# EAGLE board Spinning (EAGLE 6.2)
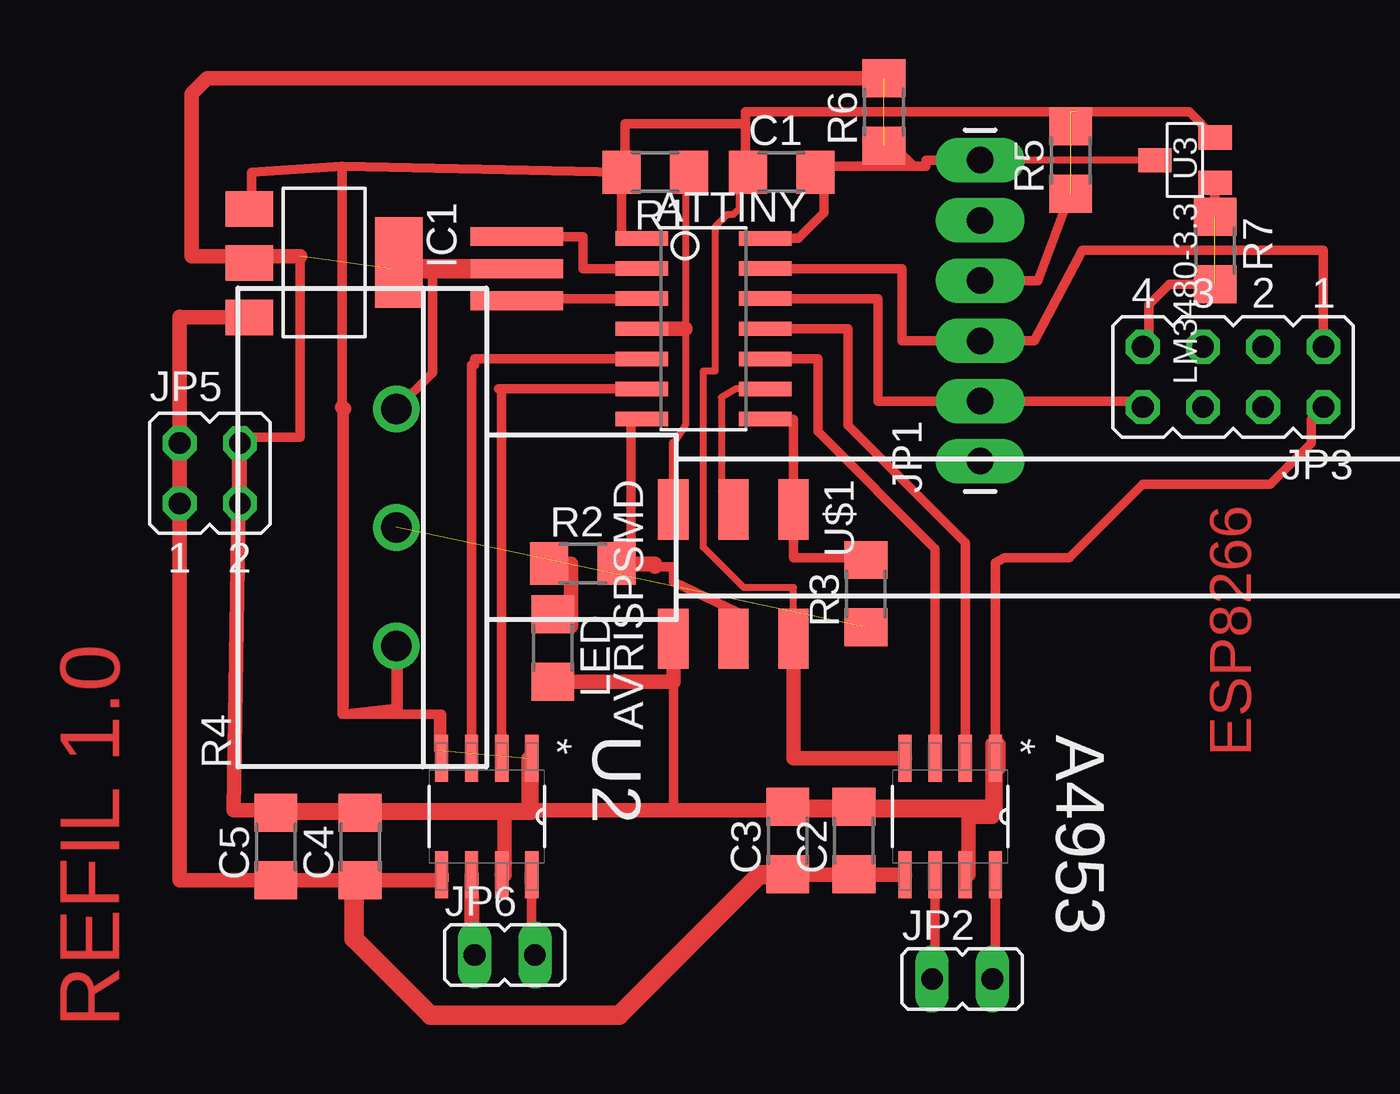
[diagram p0: board, top side]

No outline drawn. Coordinates in mm, seen from the top.
Copper layers (1*16): Top 0.035mm / dielectric 1.5mm / Bottom 0.035mm
Design rules: minimum track width 10mil, minimum drill 24mil, track to track 8mil, track to pad 8mil, pad to pad 8mil, via to via 8mil, smd to smd 8mil, copper to edge 40mil, drill to drill 8mil, minimum pad ring 10mil, minimum via ring 8mil, stop-mask expansion 4mil, vias tented up to drill 0mil, thermal gap 10mil

## Footprints (pad centres in the part's own frame; a part is rotated, then mirrored left to right if it is on the bottom)
SOIC127P600X175-8N = smd 1.981 x 0.559: 1 -2.464,1.905; 2 -2.464,0.635; 3 -2.464,-0.635; 4 -2.464,-1.905; 5 2.464,-1.905; 6 2.464,-0.635; 7 2.464,0.635; 8 2.464,1.905
SOIC14 = smd 0.61 x 2.21: 1 -3.81,-2.603; 2 -2.54,-2.603; 3 -1.27,-2.603; 4 0,-2.603; 5 1.27,-2.603; 6 2.54,-2.603; 7 3.81,-2.603; 8 3.81,2.603; 9 2.54,2.603; 10 1.27,2.603; 11 0,2.603; 12 -1.27,2.603; 13 -2.54,2.603; 14 -3.81,2.603
1206 = smd 1.6 x 1.803: 1 -1.422,0; 2 1.422,0
SOT223 = smd 1.499 x 2.007: 1 -2.261,-3.15; 2 0.025,-3.15; 3 2.311,-3.15 | smd 3.81 x 2.007: 4 0,3.15
1X06_LONGPADS = drill 1.118 pad 1.88 long: 1 0,0; 2 2.54,0; 3 5.08,0; 4 7.62,0; 5 10.16,0; 6 12.7,0
JP1 = drill 0.914 long: 1 0,-1.27; 2 0,1.27
JP4Q = drill 0.914 octagon: 1 -3.81,-1.27; 2 -3.81,1.27; 3 -1.27,-1.27; 4 -1.27,1.27; 5 1.27,-1.27; 6 1.27,1.27; 7 3.81,-1.27; 8 3.81,1.27
JP2Q = drill 0.914 octagon: 1 -1.27,-1.27; 2 -1.27,1.27; 3 1.27,-1.27; 4 1.27,1.27
EFOBM = smd 0.8 x 3.9: 1 -1.35,0; 2 0,0; 3 1.35,0
CIP20C-6MM = drill 1.3 pad 1.93: A -5,0; E 5,0; S 0,0
SOT-23-3 = smd 1.016 x 1.397: 1 -0.953,-1.27; 2 0.953,-1.27; 3 0,1.27
2X03SMD = smd 2.54 x 1.27: 1 -2.54,2.54; 2 2.92,2.54; 3 -2.54,0; 4 2.92,0; 5 -2.54,-2.54; 6 2.92,-2.54

## Placement (x,y rotation side)
A4953  ACS712ELCTR-05B-T  [SOIC127P600X175-8N]  51.05,7.37 270 top
ATTINY  ATTINY44-SSU  [SOIC14]  40.64,27.94 270 top
C1  1uF  [1206]  43.94,34.54 0 top
C2  .1uF  [1206]  46.99,6.35 90 top
C3  10uF  [1206]  44.2,6.35 90 top
C4  .1uF  [1206]  26.16,6.1 90 top
C5  10uF  [1206]  22.61,6.1 90 top
IC1  REG1118  [SOT223]  24.64,30.73 270 top
JP1  [1X06_LONGPADS]  52.32,22.35 90 top
JP2  [JP1]  51.56,0.51 270 top
JP3  [JP4Q]  62.99,25.91 180 top
JP5  [JP2Q]  19.81,21.84 0 top
JP6  [JP1]  32.26,1.52 270 top
LED  [1206]  34.29,14.48 270 top
QUARTZ  RESONATOR  [EFOBM]  32.77,30.48 90 top
R1  10k  [1206]  38.61,34.54 180 top
R2  1K  [1206]  35.56,18.03 0 top
R3  1k  [1206]  47.5,16.76 90 top
R4  [CIP20C-6MM]  27.69,19.56 90 top
R5  0  [1206]  56.13,35.05 90 top
R6  0  [1206]  48.26,37.08 90 top
R7  0  [1206]  62.23,31.24 270 top
U2  ACS712ELCTR-05B-T  [SOIC127P600X175-8N]  31.5,7.37 270 top
U3  LM3480-3.3  [SOT-23-3]  60.96,35.05 90 top
U$1  AVRISPSMD  [2X03SMD]  41.91,17.78 270 top

## Library data of the parts
A4953 U2 = Allegro_By_element14_Batch_1; MPN: ACS712ELCTR-05B-T; OC_FARNELL: 1329623; OC_NEWARK: 27M3644; PACKAGE: SOIC-8; SUPPLIER: Allegro
ATTINY QUARTZ U$1 = fab
C1-C5 = FAB_Hello
IC1 = burr-brown; MPN: REG1118-2.85/2K5G4; OC_FARNELL: unknown; OC_NEWARK: 14M2185
JP1 = SparkFun-Connectors
JP2 JP3 JP5 JP6 = jumper
LED R1-R3 R5-R7 = ng
R4 = pot
U3 = regulators

## Nets
GND: A4953.1 A4953.7 ATTINY.14 C1.2 C2.2 C3.2 C4.2 C5.2 IC1.2 JP1.6 JP3.2 JP5.3 JP5.4 LED.2 QUARTZ.2 R4.E R6.1 R6.2 U2.1 U2.7 U3.3 U$1.6
IN1A: A4953.3 ATTINY.10
IN1B: ATTINY.5 U2.3
IN2A: A4953.2 ATTINY.11
IN2B: ATTINY.6 U2.2
LEDRES: LED.1 R2.1
LEDRES1: R3.1 R4.S
MISO: ATTINY.8 R3.2 U$1.1
MOSI: ATTINY.7 R2.2 U$1.4
OUT1A: A4953.6 JP2.1
OUT1B: JP6.1 U2.6
OUT2A: A4953.8 JP2.2
OUT2B: JP6.2 U2.8
RST: ATTINY.4 R1.1 U$1.5
RX: ATTINY.12 JP1.2 JP3.8
SCK: ATTINY.9 U$1.3
TX: ATTINY.13 JP1.3 JP3.1
VBB: A4953.5 C2.1 C3.1 C4.1 C5.1 IC1.3 JP5.1 JP5.2 U2.5
VCC: A4953.4 ATTINY.1 C1.1 IC1.1 JP1.4 R1.2 R4.A R5.1 R5.2 U2.4 U3.2 U$1.2
VCCESP: JP3.7 R7.1 R7.2 U3.1
XTAL1: ATTINY.2 QUARTZ.3
XTAL2: ATTINY.3 QUARTZ.1

## Tracks (layer width: path | path; a pad name or v marks a point on that pad's centre or on a via)
GND  (3 unrouted)
  Top 0.305: U3.3 JP1.6
  Top 0.406: ATTINY.14 44.64,31.75 45.72,32.83 45.72,34.54 C1.2 45.36,34.8 49.53,34.8 | QUARTZ.2 29.72,30.48 | JP1.6 50.04,35.05 50.04,34.8 49.53,34.8 | A4953.1 52.96,18.03 52.96,18.06 53.34,18.29 56.08,18.29 59.18,21.39 64.57,21.39 66.29,23.11 66.29,24.13 JP3.2 | 39.37,13.06 39.37,7.62 | IC1.2 21.34,30.71 21.34,30.99 23.62,30.99 23.62,23.37 21.08,23.37 JP5.4 | R6.1 48.67,35.66 49.53,34.8 | 27.43,30.48 27.94,30.48 28.96,30.48 29.21,30.23 29.21,26.08 R4.E | 27.77,14.48 27.77,11.76 27.69,11.68 29.46,11.68 29.46,10.16
  Top 0.61: JP5.3 JP5.4 20.83,7.62 33.27,7.62 | 33.27,7.62 33.27,9.83 U2.1 33.4,7.52 32.26,7.52 | 33.27,7.62 39.37,7.62 51.82,7.62 | 51.82,7.62 52.32,7.62 | 52.32,7.62 52.83,7.62 | 52.83,7.62 52.96,7.62 A4953.1 | 22.61,7.87 C5.2 C4.2 32.26,7.52 | U2.7 32.26,4.9 32.26,7.52 | A4953.7 51.82,4.9 51.82,7.37 | 51.82,7.37 51.82,7.62 | C2.2 52.32,7.77 52.32,7.62 | 52.83,7.62 52.83,7.77 C3.2 51.82,7.77 51.82,7.62 | 51.82,7.37 52.83,7.37 52.83,9.65 | 53.09,9.65 52.83,9.65 | 52.83,9.65 52.83,10.41 53.09,10.41 53.09,9.4 | LED.2 39.37,13.06 U$1.6 | 23.62,30.99 19.05,30.99 19.05,37.85 19.71,38.51 R6.2
  Top 0.813: 21.49,30.73 IC1.2 | QUARTZ.2 27.94,30.48
IN1A
  Top 0.406: ATTINY.10 45.47,26.67 45.47,23.62 50.42,18.67 A4953.3
IN1B
  Top 0.406: ATTINY.5 30.99,26.67 30.99,26.42 30.86,26.42 U2.3
IN2A
  Top 0.406: ATTINY.11 46.74,27.94 46.74,23.88 51.69,18.92 A4953.2
IN2B
  Top 0.406: ATTINY.6 32.13,25.4 | 32,25.4 32.13,25.4 | 32.13,25.4 U2.2
LEDRES
  Top 0.61: LED.1 35.05,15.39 35.05,18.03 R2.1
LEDRES1  (1 unrouted)
MISO
  Top 0.406: ATTINY.8 44.45,24.13 U$1.1 44.45,18.29 47.5,18.29 R3.2
MOSI
  Top 0.406: ATTINY.7 37.59,24.13 37.59,17.9 38.61,17.9 39.37,17.9 39.37,17.27 42.03,16 41.95,14.73 41.91,14.01 U$1.4
  Top 0.61: R2.2 38.61,18.03 38.61,17.9
OUT1A
  Top 0.406: A4953.6 50.42,0.38 JP2.1
OUT1B
  Top 0.406: JP6.1 30.99,3.94 30.86,4.06
  Top 0.61: 30.86,2.03 30.86,4.06 U2.6
OUT2A
  Top 0.406: A4953.8 52.96,0.38 JP2.2
OUT2B
  Top 0.406: 33.4,4.57 33.4,1.65 JP6.2
  Top 0.61: 33.4,4.57 U2.8
RST
  Top 0.305: 39.88,34.54 39.88,27.94 39.88,23.88 39.37,23.11
  Top 0.406: R1.1 39.88,34.54 | 39.37,23.11 U$1.5
  Top 0.61: ATTINY.4 39.88,27.94
RX
  Top 0.406: ATTINY.12 48.01,29.21 48.01,24.89 JP1.2 58.93,24.89 JP3.8
SCK
  Top 0.305: ATTINY.9 42.02,25.4 41.4,25.04 41.4,21.08 U$1.3
TX
  Top 0.406: ATTINY.13 49.02,30.48 49.02,27.43 JP1.3 54.61,27.43 56.64,31.24 66.8,31.24 JP3.1
VBB
  Top 0.61: U2.5 29.59,4.67 C4.1 C5.1 18.54,4.67 JP5.1 JP5.2 18.54,28.42 | A4953.5 46.99,4.9 | 46.99,4.9 C2.1 | 46.99,4.9 44.2,4.9 C3.1 | 21.08,28.42 18.54,28.42 | 18.54,28.42 18.54,28.45
  Top 0.813: IC1.3 21.08,28.42 | 44.2,4.9 43,4.9 37.08,-1.02 29.14,-1.02 25.91,2.22 25.91,4.42 C4.1
VCC  (2 unrouted)
  Top 0.305: U$1.2 44.45,17.02 42.34,17.02 40.64,18.72 40.64,26.16 41.15,26.16 41.15,32.26 41.66,32.77 41.91,32.77 42.16,33.02 42.16,34.19 C1.1
  Top 0.406: ATTINY.1 37.19,31.75 R1.2 | R1.2 37.34,34.54 37.34,36.58 42.42,36.58 | 25.4,11.68 25.4,24.64 25.4,34.8 | 25.4,34.8 R1.2 | C1.1 42.42,34.54 42.42,36.58 | IC1.1 21.59,32.99 21.59,34.54 25.4,34.8 | 56.39,37.08 61.15,37.08 U3.2 | 56.39,37.08 42.42,37.08 42.42,36.58 | 25.4,11.68 29.59,11.68 U2.4 | 25.48,24.56 25.48,12.02 25.4,11.68 | 25.4,11.68 27.69,11.94 R4.A | JP1.4 54.76,29.97 R5.1 | R5.2 56.13,36.83 56.39,37.08
  Top 0.61: A4953.4 44.45,9.83 U$1.2 | 25.48,24.56 25.4,24.64
VCCESP  (1 unrouted)
  Top 0.406: U3.1 R7.1 | R7.2 60.3,29.82 59.44,28.96 59.44,27.43 JP3.7
XTAL1
  Top 0.406: QUARTZ.3 35.56,31.83 35.56,30.48 ATTINY.2
XTAL2
  Top 0.406: ATTINY.3 32.77,29.21 QUARTZ.1

## Text on the board
Top: ESP8266 | REFIL 1.0